# Altium PCB PCB2.PcbDoc
Units mil, origin at the board's own origin, x right, y up, seen from the top; angles counter-clockwise.
Board outline 2000 x 2000 mil, 2 copper layers (Component Side, Solder Side); 3 components, 24 nets, 48 pads, 0 vias.
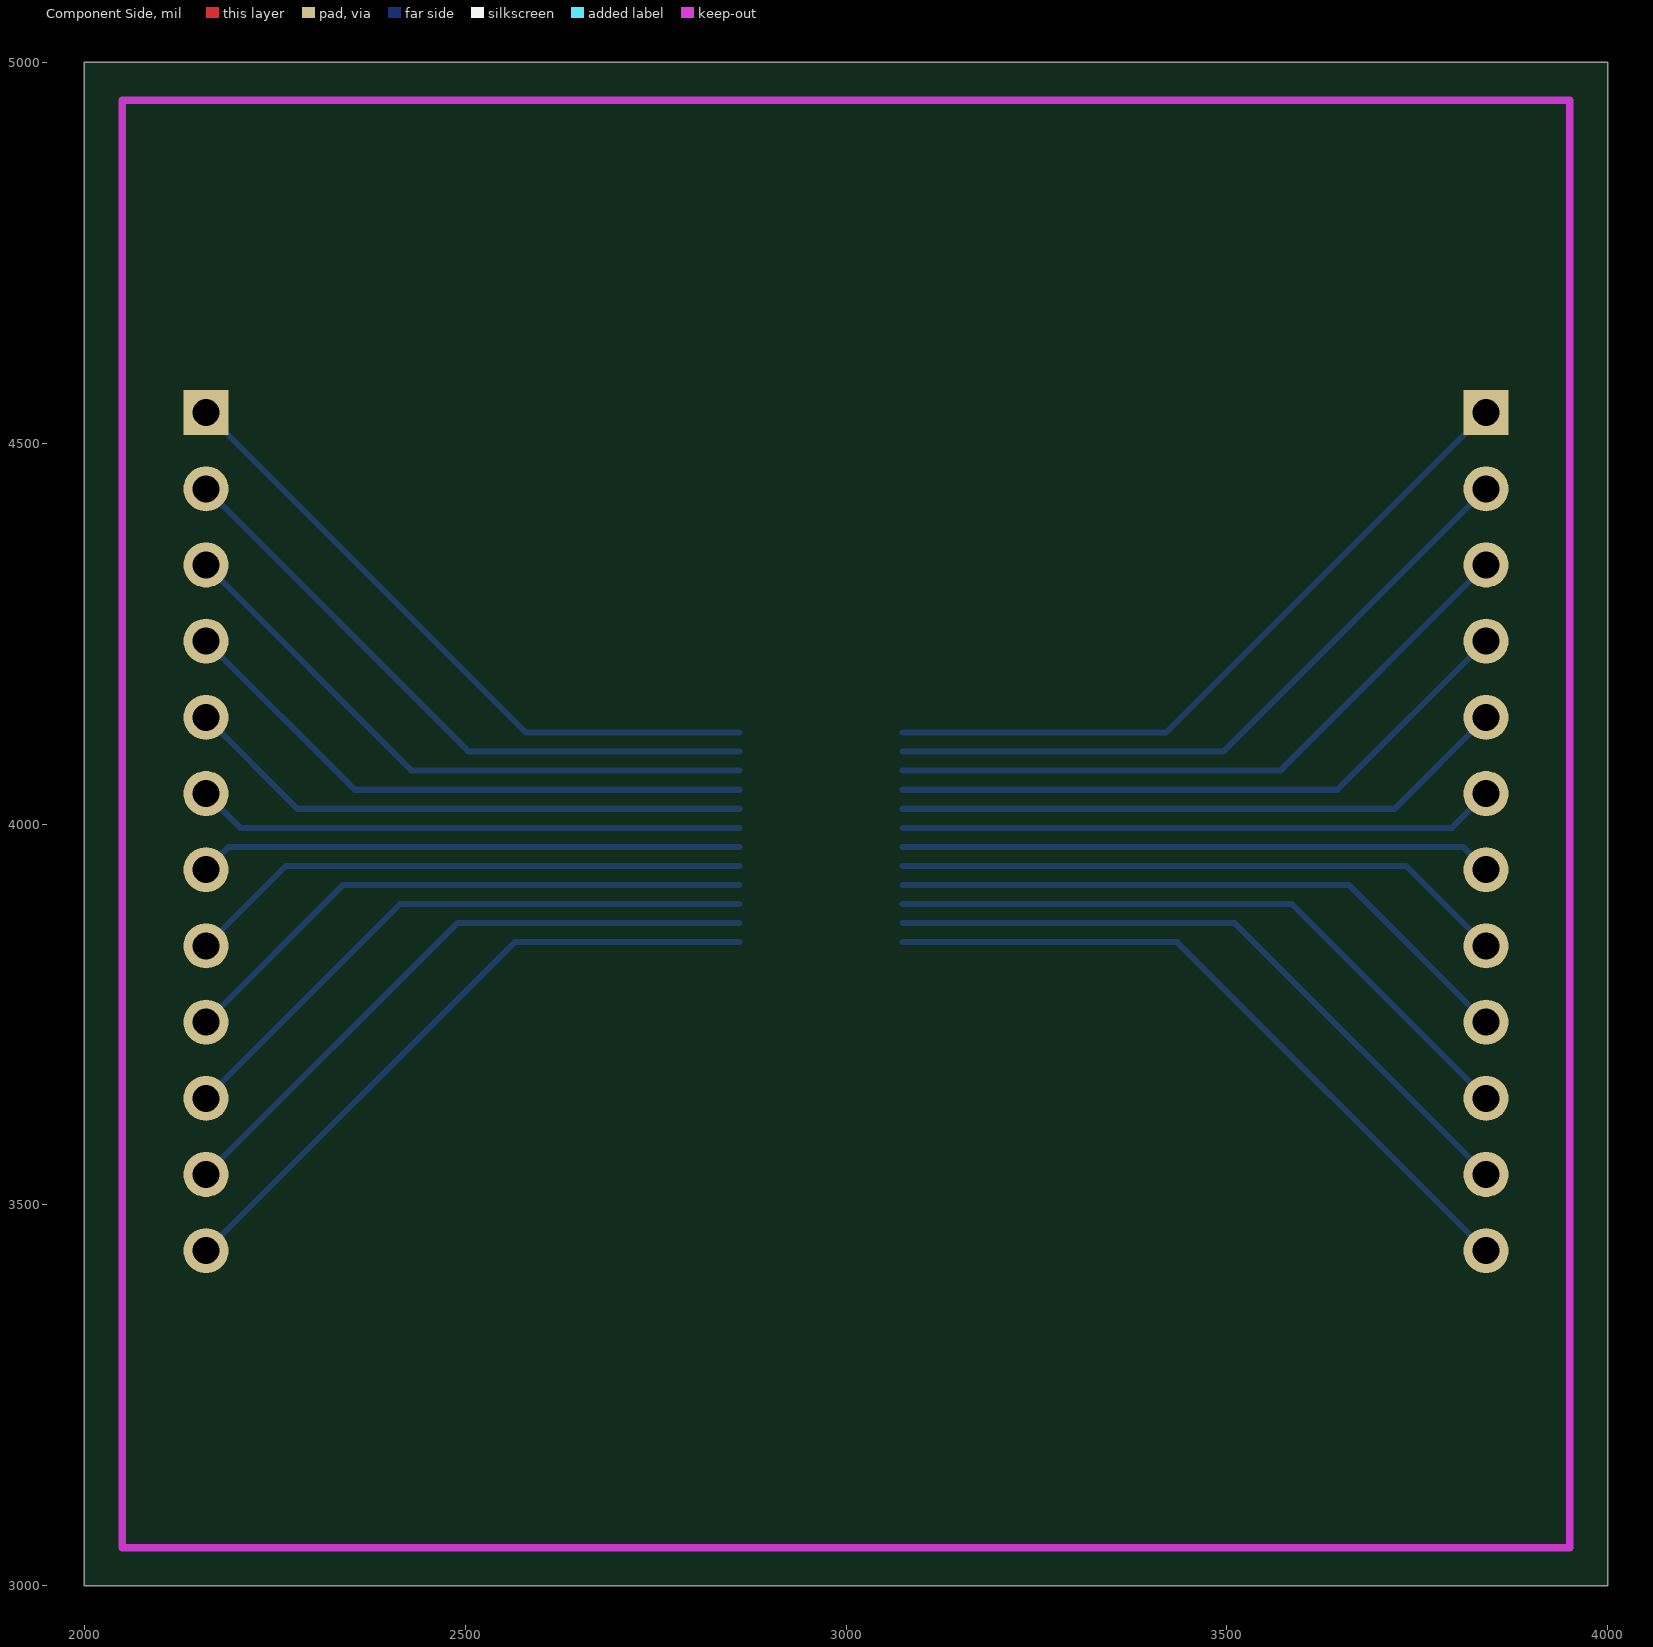
[diagram p0: Component Side view]
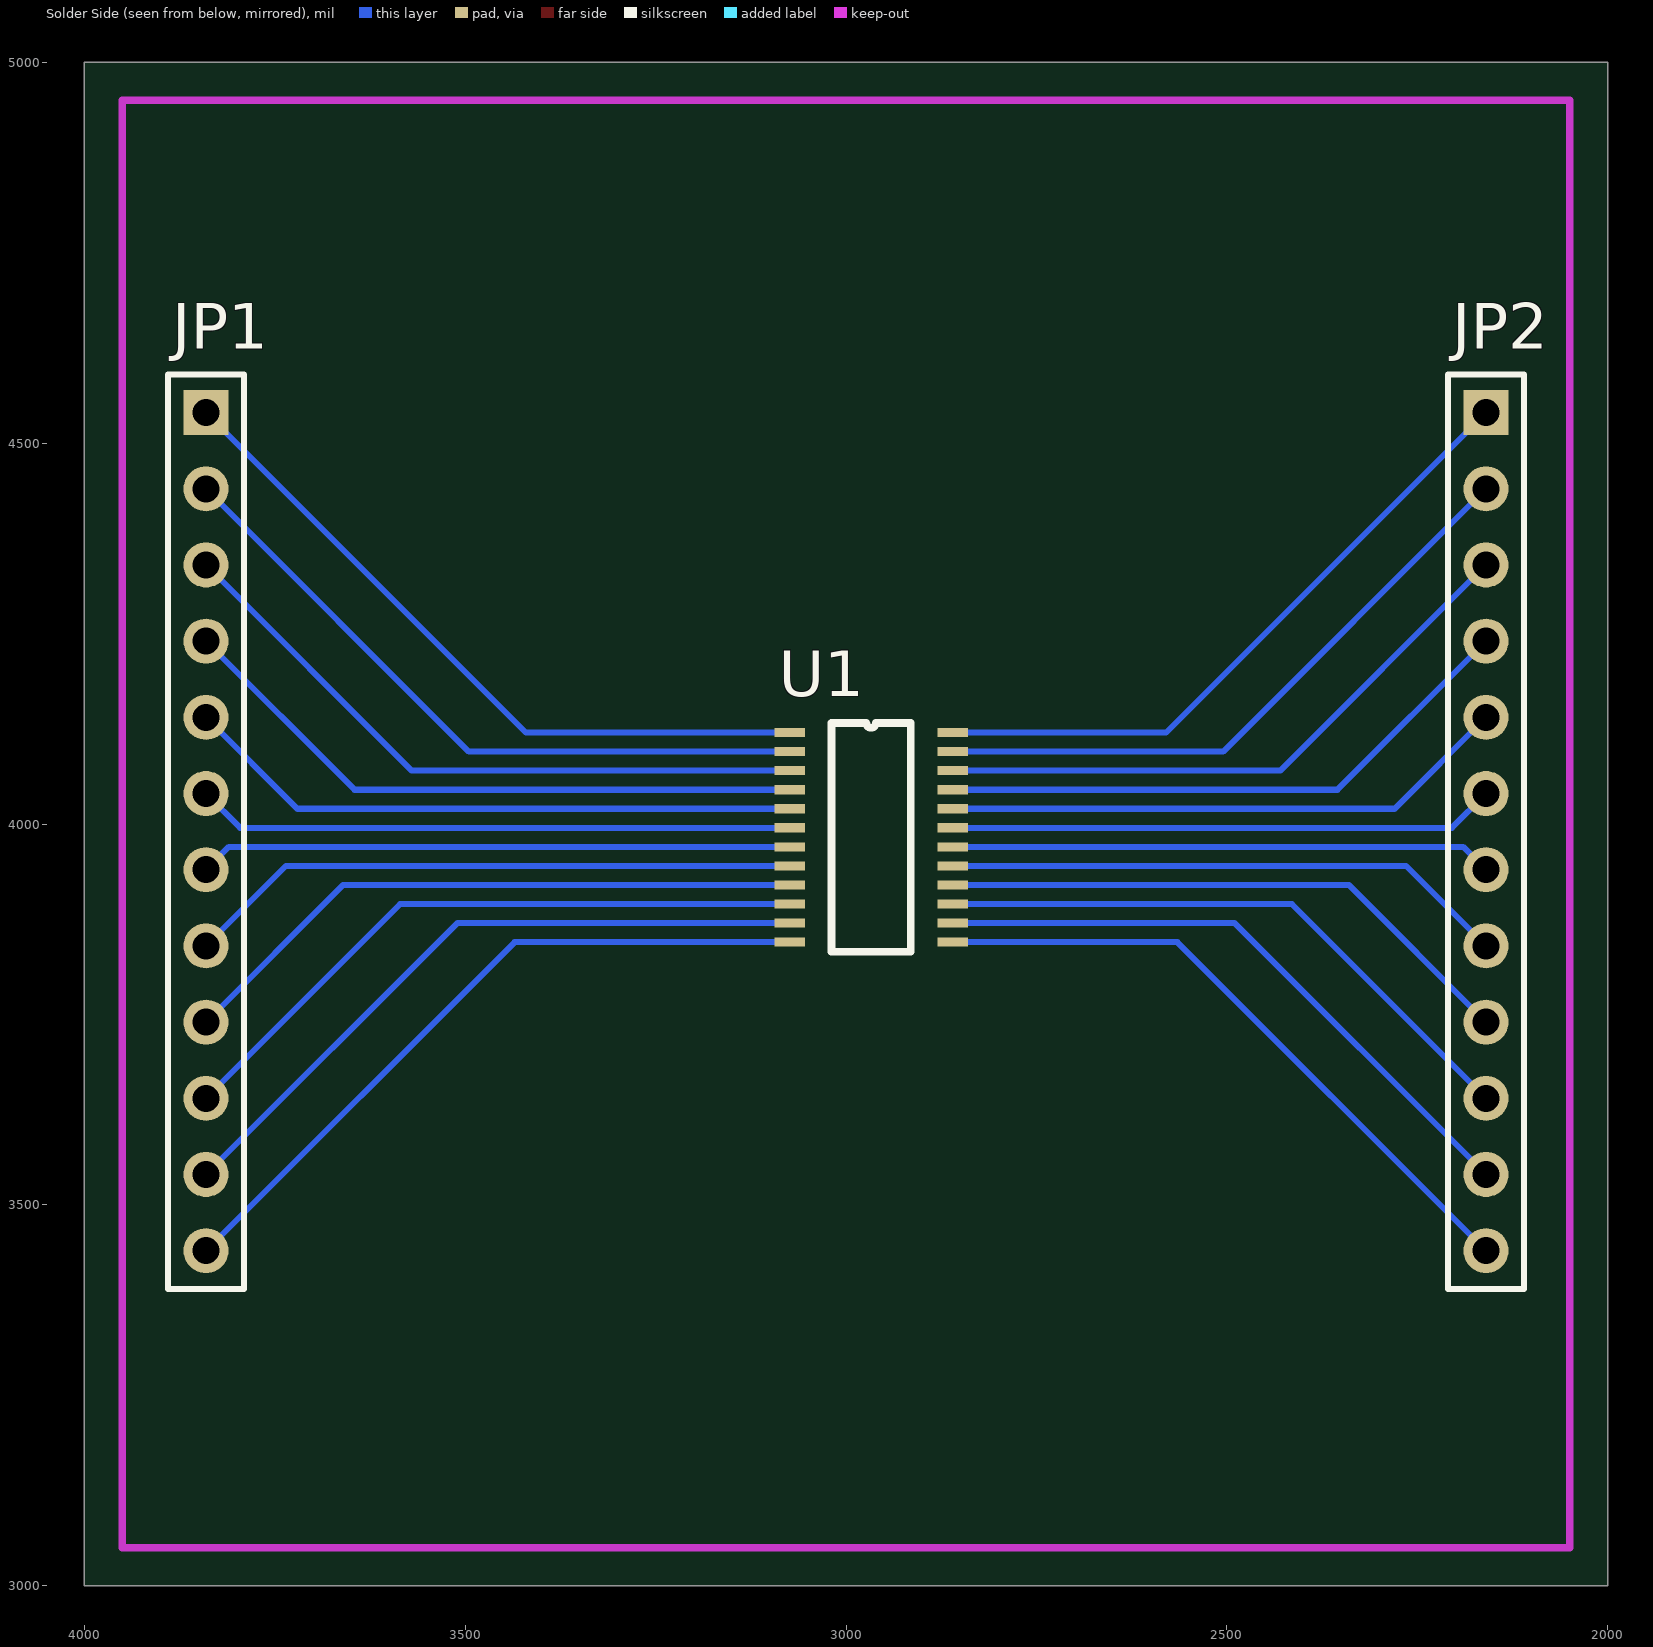
[diagram p1: Solder Side view, seen from below]

## Layer stack, top to bottom
Component Side: signal copper (thickness not stored)
Dielectric: core 12.6, FR-4, Dk 4.8
Solder Side: signal copper 1.4

## Board outline
2000,3000 4000,3000 4000,5000 2000,5000

## Design rules (kind name [scope] priority, off if disabled: settings)
Clearance [All] p1: gap=8
ComponentClearance [All] p1: gap=10 collisioncheckmode=0
PolygonConnect [All] p1: connectstyle=Relief reliefconductorwidth=10 reliefentries=4 polygonreliefangle="90 Angle"
RoomDefinition Sheet1 [InComponentClass('Sheet1')] p1: confinementstyle=ConfineIn formatcopy=TRUE outline 4000,3120 4740,3120 4740,4440 4000,4440
RoutingLayers [All] p1: top layer=Horizontal bottom layer=Vertical
RoutingVias [All] p1: holewidth=25 width=40 viastyle="Through Hole" minholewidth=28 minwidth=50 maxholewidth=28 maxwidth=50
SolderMaskExpansion [All] p1: expansion=4
TestPointUsage [All] p1: valid=0 allowmultiple=FALSE
Testpoint [All] p1: side=15 testpointundercomponent=TRUE minsize=40 maxsize=100 preferedsize=60 minholesize=0 maxholesize=40 preferedholesize=32 testpointgrid=1 style=1023 order=-539222988
Width [All] p1: maxlimit=8 minlimit=8 preferedwidth=8
16 further rules are at their usual default settings.

## Components (designator, comment, footprint, x,y, rotation, side; value= is the part's Value field where it differs from the comment)
JP1 "Header 12" HDR1X12 3840,4540 r270 bottom
JP2 "Header 12" HDR1X12 2160,4540 r270 bottom
U1 "MAX7313" QSOP24 3074,4120 r180 bottom

## Footprints (in the part's own frame and the unit in brackets; to place one, negate y for a bottom-side part, rotate by r counter-clockwise, add the part's x,y. Pads: shape width x height; smd on the part's side, far side on the other; paste and mask are expansions set on the pad)
HDR1X12 [mm]
  rect 1.5x1.5 hole 0.9: 1(0,0)
  round 1.5 hole 0.9: 2(2.54,0) 3(5.08,0) 4(7.62,0) 5(10.16,0) 6(12.7,0) 7(15.24,0) 8(17.78,0) 9(20.32,0) 10(22.86,0) 11(25.4,0) 12(27.94,0)
  silkscreen extent -1.27,-1.27 29.21,1.27
QSOP24 [mil]
  rect 40x12 smd: 1(0,0) 2(0,-25) 3(0,-50) 4(0,-75) 5(0,-100) 6(0,-125) 7(0,-150) 8(0,-175) 9(0,-200) 10(0,-225) 11(0,-250) 12(0,-275) 13(214,-275) 14(214,-250) 15(214,-225) 16(214,-200) 17(214,-175) 18(214,-150) 19(214,-125) 20(214,-100) 21(214,-75) 22(214,-50) 23(214,-25) 24(214,0)
  silkscreen extent 55,-288 159,12

## Part data
JP1 JP2: "Header, 12-Pin"

## Nets (pads, with @x,y where several pads share a name; then routed paths per layer and width w, separated by ;. In a path a pad name is that pad's centre, name@x,y a point inside that pad or via, vN(x,y) a via of type N, cw(c..) or ccw(c..) an arc to the next point about the centre after c; other vN are vias at no path point)
NetJP1_1: JP1.1 U1.1 | length 940
  Solder Side w8: U1.1 3420,4120 JP1.1
NetJP1_2: JP1.2 U1.2 | length 908.9
  Solder Side w8: U1.2 3495,4095 JP1.2
NetJP1_3: JP1.3 U1.3 | length 877.8
  Solder Side w8: U1.3 3570,4070 JP1.3
NetJP1_4: JP1.4 U1.4 | length 846.8
  Solder Side w8: U1.4 3645,4045 JP1.4
NetJP1_5: JP1.5 U1.5 | length 815.7
  Solder Side w8: U1.5 3720,4020 JP1.5
NetJP1_6: JP1.6 U1.6 | length 784.6
  Solder Side w8: U1.6 3795,3995 JP1.6
NetJP1_7: JP1.7 U1.7 | length 778.4
  Solder Side w8: U1.7 3810,3970 JP1.7
NetJP1_8: JP1.8 U1.8 | length 809.5
  Solder Side w8: U1.8 3735,3945 JP1.8
NetJP1_9: JP1.9 U1.9 | length 840.6
  Solder Side w8: U1.9 3660,3920 JP1.9
NetJP1_10: JP1.10 U1.10 | length 871.6
  Solder Side w8: U1.10 3585,3895 JP1.10
NetJP1_11: JP1.11 U1.11 | length 902.7
  Solder Side w8: U1.11 3510,3870 JP1.11
NetJP1_12: JP1.12 U1.12 | length 933.8
  Solder Side w8: U1.12 3435,3845 JP1.12
NetJP2_1: JP2.1 U1.24 | length 874
  Solder Side w8: JP2.1 2580,4120 U1.24
NetJP2_2: JP2.2 U1.23 | length 842.9
  Solder Side w8: JP2.2 2505,4095 U1.23
NetJP2_3: JP2.3 U1.22 | length 811.8
  Solder Side w8: JP2.3 2430,4070 U1.22
NetJP2_4: JP2.4 U1.21 | length 780.8
  Solder Side w8: JP2.4 2355,4045 U1.21
NetJP2_5: JP2.5 U1.20 | length 749.7
  Solder Side w8: JP2.5 2280,4020 U1.20
NetJP2_6: JP2.6 U1.19 | length 718.6
  Solder Side w8: JP2.6 2205,3995 U1.19
NetJP2_7: JP2.7 U1.18 | length 712.4
  Solder Side w8: JP2.7 2190,3970 U1.18
NetJP2_8: JP2.8 U1.17 | length 743.5
  Solder Side w8: JP2.8 2265,3945 U1.17
NetJP2_9: JP2.9 U1.16 | length 774.6
  Solder Side w8: JP2.9 2340,3920 U1.16
NetJP2_10: JP2.10 U1.15 | length 805.6
  Solder Side w8: JP2.10 2415,3895 U1.15
NetJP2_11: JP2.11 U1.14 | length 836.7
  Solder Side w8: JP2.11 2490,3870 U1.14
NetJP2_12: JP2.12 U1.13 | length 867.8
  Solder Side w8: JP2.12 2565,3845 U1.13

## Keep-outs
Keep-Out Layer:
  lines w10: 2050,3050 3950,3050 3950,4950 2050,4950 2050,3050